# Altium PCB Laser_Arduino.PcbDoc
Units mm, origin at the board's own origin, x right, y up, seen from the top; angles counter-clockwise.
Board outline 50.7 x 53.23 mm, 2 copper layers (Top Layer, Bottom Layer), stack 1.671 mm thick; 23 components, 18 nets, 92 pads, 2 vias.
Unrouted connection lines stored in the file: 6.
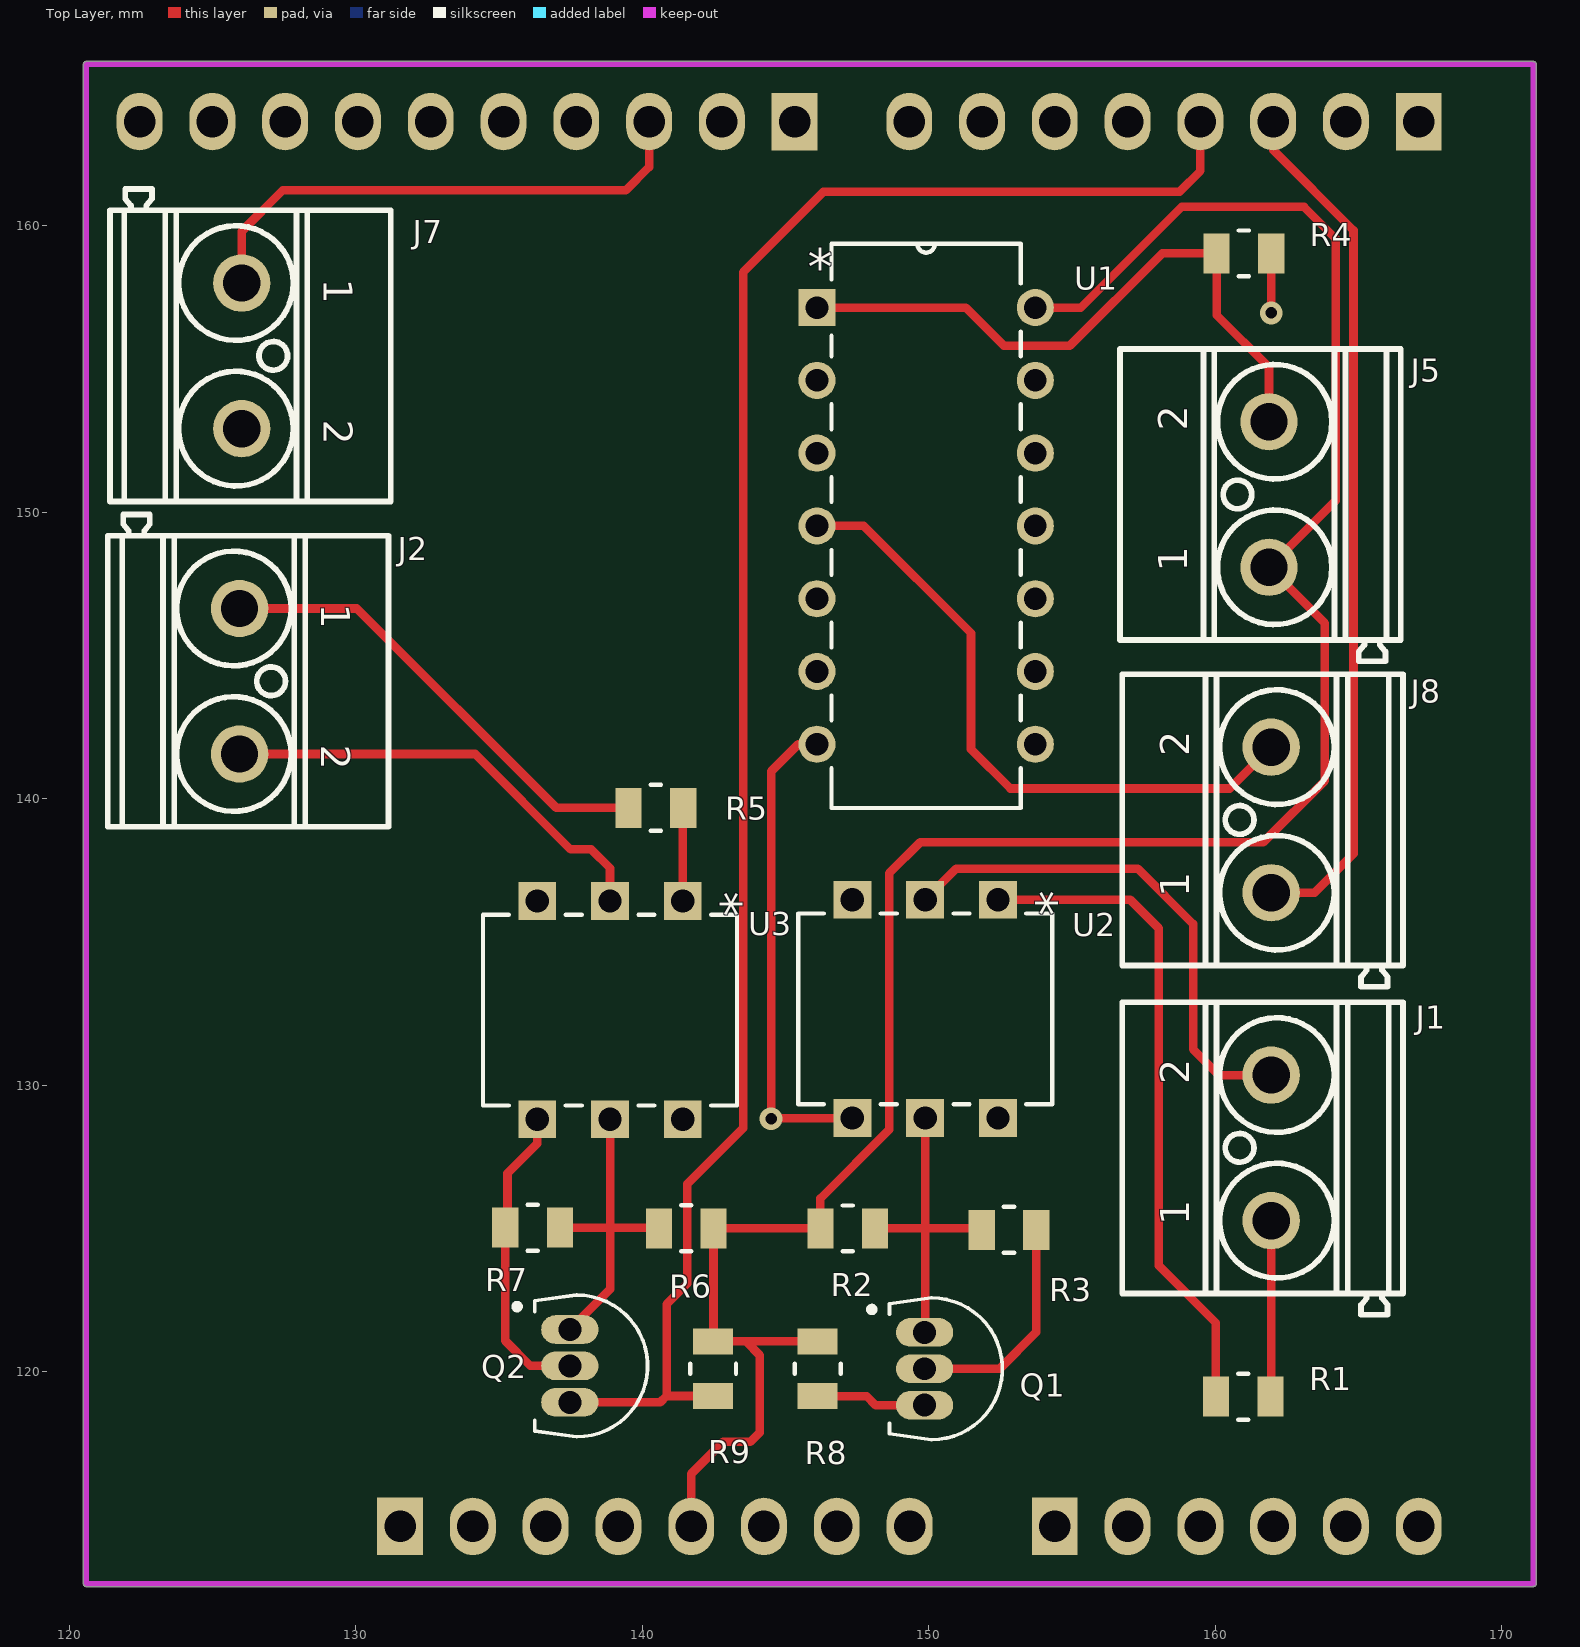
[diagram p0: Top Layer view]
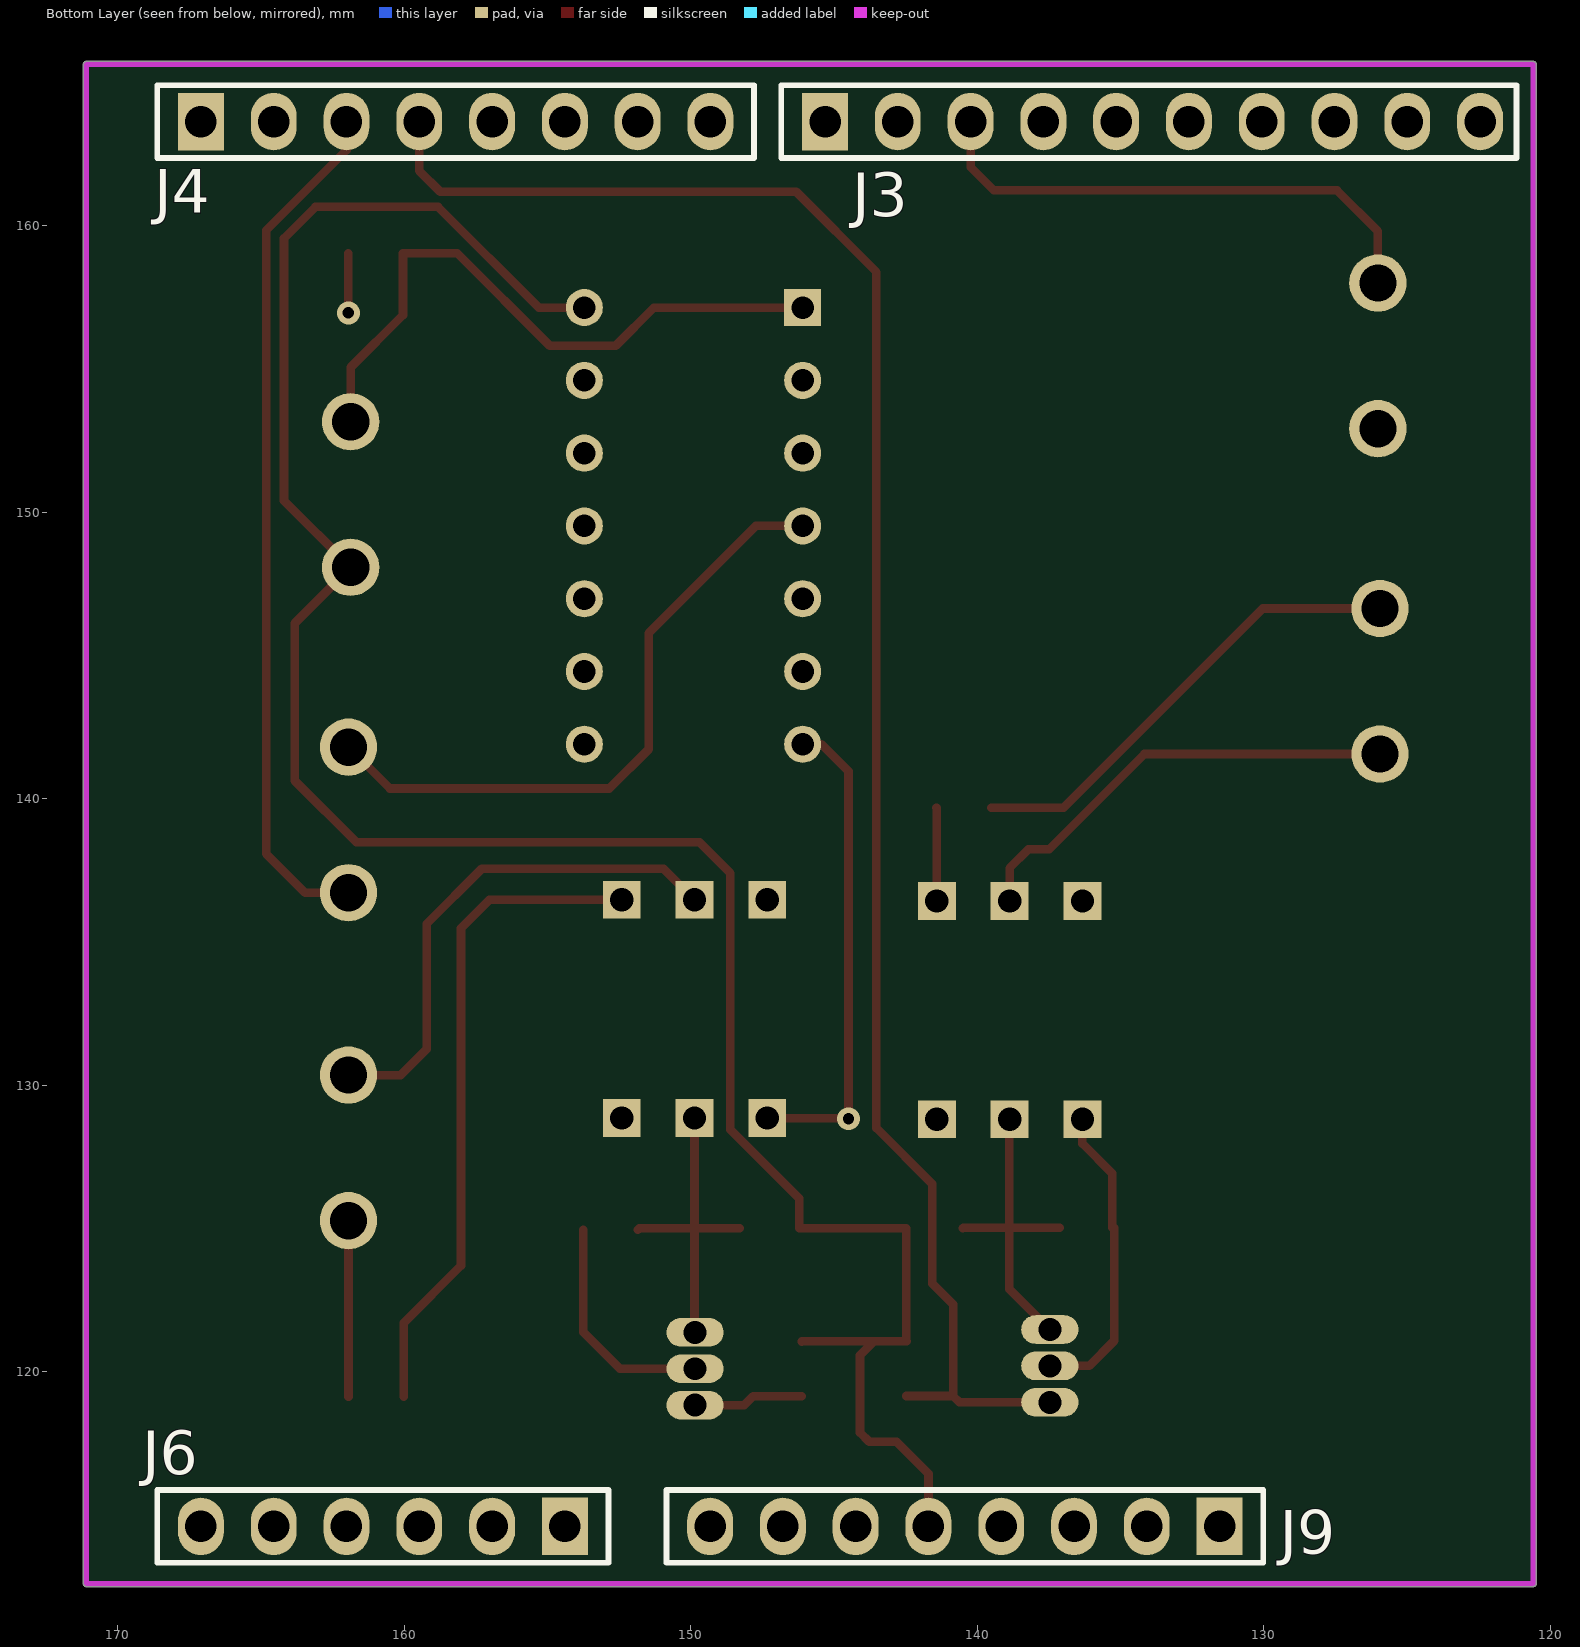
[diagram p1: Bottom Layer view, seen from below]
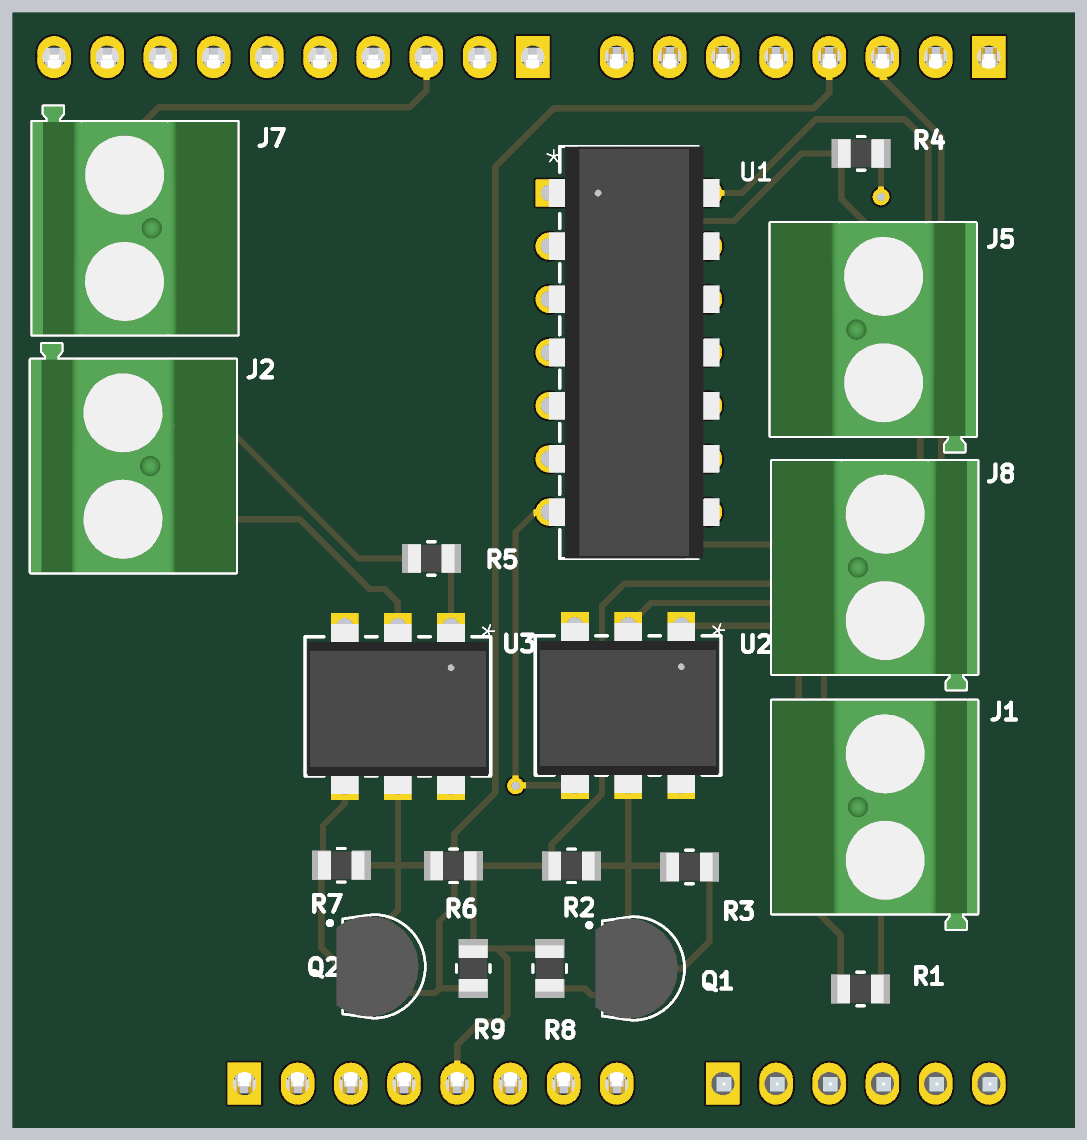
[diagram p2: 3D render of the assembled board from above, using the file's embedded part models]
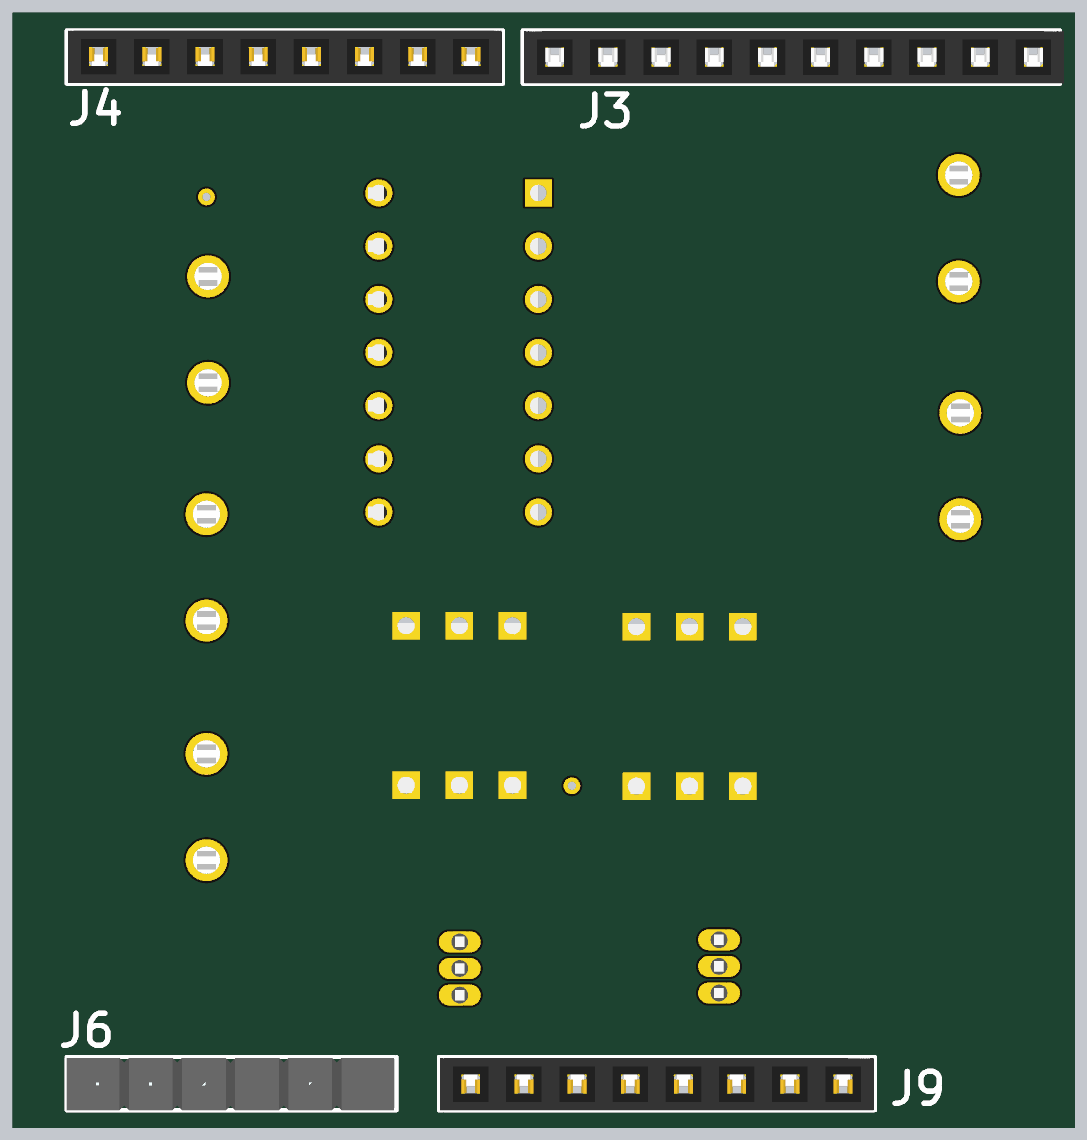
[diagram p3: 3D render of the assembled board from below, using the file's embedded part models]

## Layer stack, top to bottom
Top Solder: solder mask 0.0102, Solder Resist, Dk 3.5
Top Layer: signal copper 0.0356
Dielectric 1: dielectric 1.6, FR-4, Dk 4.8
Bottom Layer: signal copper 0.0356
Bottom Solder: solder mask 0.0102, Solder Resist, Dk 3.5

## Board outline
120.5,112.6 ccw(c120.6,112.6) 120.6,112.5 171.1,112.5 ccw(c171.1,112.6) 171.2,112.6 171.2,165.6 ccw(c171.1,165.6) 171.2,165.612 171.2,165.613 ccw(c171.1,165.625) 171.2,165.625 ccw(c171.1,165.625) 171.1,165.725 120.6,165.725 ccw(c120.6,165.625) 120.5,165.625

## Design rules (kind name [scope] priority, off if disabled: settings)
Clearance Clearance_poly [All vs InPolygon] p1: gap=0.4 ignorepadtopadclearanceinfootprint=FALSE
Clearance [All] p2: gap=0.1 ignorepadtopadclearanceinfootprint=FALSE
HoleSize [All] p1: absolutevalues=TRUE maxlimit=4 minlimit=0.025 maxpercent=80.000 minpercent=20.000
MinimumSolderMaskSliver [All] p1: minsoldermaskwidth=0.1
PolygonConnect PolygonConnect_via [InNet('GND') vs IsVia] p1: connectstyle=Direct reliefconductorwidth=0.254 reliefentries=4 polygonreliefangle="90 Angle" airgapwidth=0.254
PolygonConnect [All] p2: connectstyle=Relief reliefconductorwidth=0.254 reliefentries=4 polygonreliefangle="90 Angle" airgapwidth=0.254
RoutingVias [All] p1: holewidth=0.4 width=0.8 viastyle="Through Hole" minholewidth=0.4 minwidth=0.8 maxholewidth=3.2 maxwidth=5.5
SilkToSilkClearance [All] p1: silktosilkclearance=0.1
SilkToSolderMaskClearance [IsPad] p1: minsilkscreentomaskgap=0.1 clearancetoexposedcopper=TRUE
SolderMaskExpansion [All] p1: expansion=0.102
Width [All] p1: maxlimit=2 minlimit=0.2 preferedwidth=0.3
26 further rules are at their usual default settings.

## Components (designator, comment, footprint, x,y, rotation, side; value= is the part's Value field where it differs from the comment)
J1 "Family" PHOENIX_1715721 161.95,127.81 r90 top
J2 "Family" PHOENIX_1715721 125.95,144.095 r270 top
J3 "HDR Female" Female_Header_10 145.32,163.625 r90 bottom locked
J4 "" "HDR Female 1�~8 2.54mm" 167.1,163.625 r90 bottom locked
J5 "Family" PHOENIX_1715721 161.875,150.611 r90 top
J6 "HDR Female 1×6" "HDR Female 1�~6 2.54mm" 154.4,114.6 r270 bottom locked
J7 "Family" PHOENIX_1715721 126.025,155.45 r270 top
J8 "Family" PHOENIX_1715721 161.95,139.255 r90 top
J9 "" "HDR Female 1�~8 2.54mm" 131.55,114.6 r270 bottom locked
Q1 "n-p-n" TO92127P495H695-3 150.6,120.1 r270 top
Q2 "n-p-n" TO92127P495H695-3 138.218,120.2 r270 top
R1 "Res1" STA_RMCF0805_STP-M 160.975,119.125 r0 top
R2 "Res1" STA_RMCF0805_STP-M 147.172,125 r180 top
R3 "Res1" STA_RMCF0805_STP-M 152.803,124.95 r180 top
R4 "Res1" STA_RMCF0805_STP-M 161,159.025 r180 top
R5 "Res1" STA_RMCF0805_STP-M 140.477,139.677 r180 top
R6 "Res1" STA_RMCF0805_STP-M 141.538,125.002 r0 top
R7 "Res1" STA_RMCF0805_STP-M 136.175,125.025 r0 top
R8 "Res1" STA_RMCF0805_STP-M 146.125,120.1 r90 top
R9 "Res1" STA_RMCF0805_STP-M 142.475,120.102 r90 top
U1 "SN74HC14N" N14 153.72,141.895 r0 top
U2 "4N33" DIP-6_4N33_VIS 152.415,136.47 r270 top
U3 "4N33" DIP-6_4N33_VIS 141.417,136.427 r270 top

## Footprints (in the part's own frame and the unit in brackets; to place one, negate y for a bottom-side part, rotate by r counter-clockwise, add the part's x,y. Pads: shape width x height; smd on the part's side, far side on the other; paste and mask are expansions set on the pad)
DIP-6_4N33_VIS [mil]
  rect 52x52 hole 32 mask+0: 1(0,0) 2(0,-100) 3(0,-200) 4(300,-200) 5(300,-100) 6(300,0)
  silkscreen extent 19,-274 281,75, body extent -5,-269 315,69, height 155
Female_Header_10 [mm]
  rect 2x1.6 hole 1.1: 1(0,0)
  oval 2x1.6 hole 1.1: 2(0,-2.54) 3(0,-5.08) 4(0,-7.62) 5(0,-10.16) 6(0,-12.7) 7(0,-15.24) 8(0,-17.78) 9(0,-20.32) 10(0,-22.86)
  silkscreen extent -1.27,-24.13 1.27,1.52, body extent -1.25,-24.33 1.25,1.47, height 8.31
"HDR Female 1�~6 2.54mm" [mm]
  rect 2x1.6 hole 1.1: 1(0,0)
  oval 2x1.6 hole 1.1: 2(0,-2.54) 3(0,-5.08) 4(0,-7.62) 5(0,-10.16) 6(0,-12.7)
  silkscreen extent -1.27,-14.22 1.27,1.52, body extent -1.23,-14.22 1.27,1.42, height 8.66
"HDR Female 1�~8 2.54mm" [mm]
  rect 2x1.6 hole 1.1: 1(0,0)
  oval 2x1.6 hole 1.1: 2(0,-2.54) 3(0,-5.08) 4(0,-7.62) 5(0,-10.16) 6(0,-12.7) 7(0,-15.24) 8(0,-17.78)
  silkscreen extent -1.27,-19.3 1.27,1.52, body extent -1.23,-19.25 1.27,1.47, height 8.31
N14 [mil]
  rect 51x51 hole 31: 1(-300,600)
  round 51 hole 31: 2(-300,500) 3(-300,400) 4(-300,300) 5(-300,200) 6(-300,100) 7(-300,0) 8(0,0) 9(0,100) 10(0,200) 11(0,300) 12(0,400) 13(0,500) 14(0,600)
  silkscreen extent -280,-88 -20,688, body extent -300,-87 20,687, height 205
PHOENIX_1715721 [mm] "Terminal Block, 17.5A 400V, Pitch 5.08mm, 2 Positions, Screw Connection"
  round 2 hole 1.3: 1(-2.54,0) 2(2.54,0)
  silkscreen extent -5.82,-4.6 5.08,5.2, body extent -5.82,-4.6 5.08,5.2, height 14.2
STA_RMCF0805_STP-M [mil]
  rect 36x55 smd paste+0 mask+0: 1(-37.5,0) 2(37.5,0)
  silkscreen extent -7,-32 7,32, body extent -44,-26 44,26, height 26
TO92127P495H695-3 [mm]
  oval 1x2 hole 0.8: 1(-1.27,-0.745) 2(0,-0.745) 3(1.27,-0.745)
  silkscreen extent -2.47,-2.68 2.47,1.97, body extent -2.4,-2.27 2.4,1.66, height 9

## Part data
J1 J2 J5 J7 J8: "Connection -POENIX", Manufacturer="PHOENIX CONTACT", Manufacturer Part Number="1715721 (MKDS 1,5/2-5,08)", Part Number=PHOENIX_1715721, Author="CERN DEM JLC", ComponentHeight=13.8mm, Component Type=Standard, CreateDate=06.01.2010, HelpURL=\\cern.ch\dfs\Applications\Altium\Datasheets\PHOENIX_1715721.pdf, LatestRevisionDate=25.02.2013, Mounted=Yes, Part Description="17.5A, 400V, Terminal Block, Pitch 5.08mm, 2 Positions, Screw Connection", Pin Count=2, PressFit=No, Sense=No, SMD=No, Socket=No, Status=None
J3: library part M20-7821046, "HARWIN - M20-7821046 - Board-To-Board Connector, M20 Series, Through Hole, Receptacle, 10, 2.54 mm, Tin Plated Contacts", Case/Package=SIL, Color=Black, Contact Resistance=20mR, Current Rating=3A, Insulation Resistance=1MR, Manufacturer=Harwin, Max Operating Temperature=105°C, Min Operating Temperature=-40°C, Package Quantity=23, Supplier Part Number 1=952-1847-ND, Category="Headers and Wire Housings", ComponentLink1Description=https://datasheet.ciiva.com/26899/getdatasheetpartid-559226-26899379.pdf?src-supplier=Verical, ComponentLink1URL=https://datasheet.ciiva.com/26899/getdatasheetpartid-559226-26899379.pdf?src-supplier=Verical, ComponentLink2Description=https://datasheet.ciiva.com/11753/0900766b80dc1d2b-11753869.pdf?src-supplier=RSComponents, ComponentLink2URL=https://datasheet.ciiva.com/11753/0900766b80dc1d2b-11753869.pdf?src-supplier=RSComponents, ComponentLink3Description=https://datasheet.ciiva.com/6785/m20-782-6785605.pdf?src-supplier=Digi-Key, ComponentLink3URL=https://datasheet.ciiva.com/6785/m20-782-6785605.pdf?src-supplier=Digi-Key, ComponentLink4Description=https://datasheet.ciiva.com/10151/m20-782-10151366.pdf?src-supplier=Avnet, ComponentLink4URL=https://datasheet.ciiva.com/10151/m20-782-10151366.pdf?src-supplier=Avnet, ComponentLink5Description=https://datasheet.ciiva.com/16732/m20-782-16732152.pdf?src-supplier=Avnet+Europe, ComponentLink5URL=https://datasheet.ciiva.com/16732/m20-782-16732152.pdf?src-supplier=Avnet+Europe, Connector Type=Receptacle,Socket, Contact Gender=Female, Contact Material=Bronze, Contact Plating=Tin, Depth=2.5mm, Gender=Receptacle, Hole Diameter=0.8mm, Housing Color=Black, Housing Material=Polyamide, Lead Pitch=2.54mm, Length=25.8mm, Manufacturer Part Number=M20-7821046, Mating Cycles=50, Max Current Rating=3A, Mount="Through Hole", Number of Contacts=10, Number of Positions=10, Number of Rows=1, Orientation=Straight, Packaging=Rail/Tube, Pitch=2.54mm, Pricing 1="1=1,28000, 10=1,12200, 100=0,96800, 500=0,79200, 1000=0,70400, 5000=0,61600, 10000=0,58520 (USD)", Radiation Hardening=No, REACH SVHC="No SVHC", RoHS=Yes, Stock 1=97, Supplier 1=Digi-Key, Termination=Solder
J4: library part M20-7820646, "06-WAY SIL VERT SOCKET L/FREE", Case/Package=SIL, Color=Black, Contact Resistance=20mR, Manufacturer=Harwin, Max Current Rating=3A, Max Operating Temperature=105°C, Min Operating Temperature=-40°C, Package Quantity=38, Supplier Part Number 1=952-1809-ND, Category="Headers and Wire Housings", ComponentLink1Description=http://components.arrow.com/part/dataview/0323_00725884?src-supplier=Arrow+Europe, ComponentLink1URL=http://components.arrow.com/part/dataview/0323_00725884?src-supplier=Arrow+Europe, ComponentLink2Description=http://www.harwin.com/include/downloads/pdfs/2010PAGE120.PDF?src-supplier=Avnet, ComponentLink2URL=http://www.harwin.com/include/downloads/pdfs/2010PAGE120.PDF?src-supplier=Avnet, ComponentLink3Description=https://cdn.harwin.com/pdfs/M20-782.pdf?src-supplier=Digi-Key, ComponentLink3URL=https://cdn.harwin.com/pdfs/M20-782.pdf?src-supplier=Digi-Key, ComponentLink4Description=https://cdn.harwin.com/pdfs/Harwin_PC_Connectors_M20.pdf?src-supplier=Avnet+Europe, ComponentLink4URL=https://cdn.harwin.com/pdfs/Harwin_PC_Connectors_M20.pdf?src-supplier=Avnet+Europe, ComponentLink5Description=https://cdn.harwin.com/pdfs/Harwin_PC_Connectors_M20.pdf?src-supplier=RSComponents, ComponentLink5URL=https://cdn.harwin.com/pdfs/Harwin_PC_Connectors_M20.pdf?src-supplier=RSComponents, ComponentLink6Description=https://cdn.harwin.com/pdfs/Harwin_PC_Connectors_M20.pdf?src-supplier=Mouser, ComponentLink6URL=https://cdn.harwin.com/pdfs/Harwin_PC_Connectors_M20.pdf?src-supplier=Mouser, ComponentLink7Description=https://cdn.harwin.com/pdfs/Harwin_PC_Connectors_M20.pdf?src-supplier=TTI, ComponentLink7URL=https://cdn.harwin.com/pdfs/Harwin_PC_Connectors_M20.pdf?src-supplier=TTI, Connector Type=Receptacle,Socket, Contact Gender=Female, Contact Material=Bronze, Contact Plating=Tin, Depth=2.5mm, Gender=Female, Housing Color=Black, Housing Material=Nylon, Length=15.64mm, Manufacturer Part Number=M20-7820646, Mount="Through Hole", Number of Contacts=6, Number of Positions=6, Number of Rows=1, Orientation=Straight, Packaging=Rail/Tube, Pitch=2.54mm, Pricing 1="1=0,96000, 10=0,84200, 100=0,72600, 500=0,59400, 1000=0,52800, 5000=0,46200, 10000=0,43890 (USD)", Radiation Hardening=No, RoHS=Yes, Stock 1=1563, Supplier 1=Digi-Key, Termination=Solder
J6 J9: library part M20-7820842, "2.54mm (0.1\") Pitch SIL Vertical PC Tail Socket Assembly, selective gold + tin, 8 contacts", Case/Package=SIL, Color=Black, Contact Resistance=20mR, Manufacturer=Harwin, Max Current Rating=3A, Max Operating Temperature=105°C, Min Operating Temperature=-40°C, Package Quantity=29, Supplier Part Number 1=952-1823-ND, Category="Headers and Wire Housings", ComponentLink1Description=https://datasheet.ciiva.com/16732/m20-782-16732663.pdf?src-supplier=Avnet+Europe, ComponentLink1URL=https://datasheet.ciiva.com/16732/m20-782-16732663.pdf?src-supplier=Avnet+Europe, ComponentLink2Description=https://datasheet.ciiva.com/9480/m20-782-9480074.pdf?src-supplier=Avnet, ComponentLink2URL=https://datasheet.ciiva.com/9480/m20-782-9480074.pdf?src-supplier=Avnet, Connector Type=Receptacle,Socket, Contact Gender=Female, Contact Material=Bronze, Contact Plating=Tin,Gold, Depth=2.5mm, Gender=Female, Housing Color=Black, Housing Material=Polyamide, Length=20.72mm, Manufacturer Part Number=M20-7820842, Mount="Through Hole", Number of Contacts=8, Number of Positions=8, Number of Rows=1, Orientation=Straight, Packaging=Rail/Tube, Pitch=2.54mm, Pricing 1="1=1,10000, 10=0,97200, 100=0,83820, 500=0,68580, 1000=0,60960, 5000=0,53340, 10000=0,50673 (USD)", Radiation Hardening=No, RoHS=Yes, Stock 1=1803, Supplier 1=Digi-Key, Termination=Solder, Weight=0.025397oz
Q1 Q2: library part KT417, "Bipolar transistor"
R1: "Chip Resistor", Case/Package=0603, Case Code (Metric)=1608, Manufacturer=Panasonic, Manufacturer Part Number=ERJ-3GEYJ103V, Max Operating Temperature=155°C, Max Power Dissipation=100mW, Min Operating Temperature=-55°C, Package Quantity=1, Resistance=130, Supplier Part Number 1=P10KGDKR-ND, Temperature Coefficient=200ppm/°C, Tolerance=5%, Voltage Rating=75V, Voltage Rating (DC)=50V, Case Code (Imperial)=0603, ComponentLink1Description=https://datasheet.ciiva.com/34303/2007265-34303757.pdf, ComponentLink1URL=https://datasheet.ciiva.com/34303/2007265-34303757.pdf, ComponentLink2Description=https://datasheet.ciiva.com/11809/0900766b80f806dd-11809566.pdf, ComponentLink2URL=https://datasheet.ciiva.com/11809/0900766b80f806dd-11809566.pdf, ComponentLink3Description=https://datasheet.ciiva.com/28514/1678796-28514213.pdf, ComponentLink3URL=https://datasheet.ciiva.com/28514/1678796-28514213.pdf, ComponentLink4Description=https://datasheet.ciiva.com/30147/4aoa0000ce1-30147029.pdf, ComponentLink4URL=https://datasheet.ciiva.com/30147/4aoa0000ce1-30147029.pdf, ComponentLink5Description=https://datasheet.ciiva.com/46371/1678796-46371909.pdf, ComponentLink5URL=https://datasheet.ciiva.com/46371/1678796-46371909.pdf, ComponentLink6Description=https://datasheet.ciiva.com/24133/aoa0000ce1-37422-24133064.pdf, ComponentLink6URL=https://datasheet.ciiva.com/24133/aoa0000ce1-37422-24133064.pdf, ComponentLink7Description=https://datasheet.ciiva.com/46385/1678796-46385240.pdf, ComponentLink7URL=https://datasheet.ciiva.com/46385/1678796-46385240.pdf, ComponentLink8Description=https://datasheet.ciiva.com/17212/aoa0000ce1-17212106.pdf, ComponentLink8URL=https://datasheet.ciiva.com/17212/aoa0000ce1-17212106.pdf, ComponentLink9Description=https://datasheet.ciiva.com/9117/aoa0000ce1-9117038.pdf, ComponentLink9URL=https://datasheet.ciiva.com/9117/aoa0000ce1-9117038.pdf, ComponentLink10Description=https://datasheet.ciiva.com/16740/aoa0000ce1-16740655.pdf, ComponentLink10URL=https://datasheet.ciiva.com/16740/aoa0000ce1-16740655.pdf, ComponentLink11Description=https://datasheet.ciiva.com/48531/aoa0000ce1-48531887.pdf, ComponentLink11URL=https://datasheet.ciiva.com/48531/aoa0000ce1-48531887.pdf, Composition="Thick Film", Contact Plating=Tin, Depth=0.8mm, Features="Automotive AEC-Q200", Height=0.45mm, Lead Free="Lead Free", Length=1.6mm, Military Standard=Not, Mount="Surface Mount", Number of Terminations=2, Packaging="Tape and Reel", Power Rating=100mW, Pricing 1="1=0.1, 10=0.054, 100=0.022, 1000=0.00988, 2500=0.00858 (USD)", REACH SVHC="No SVHC", Stock 1=10740434, Supplier 1=Digi-Key, Termination=SMD/SMT, Weight=7.1E-05oz, Width=0.8mm, Working Voltage=75V
R2 R5 R6: "Chip Resistor", Case/Package=0603, Case Code (Metric)=1608, Manufacturer=Panasonic, Manufacturer Part Number=ERJ-3GEYJ103V, Max Operating Temperature=155°C, Max Power Dissipation=100mW, Min Operating Temperature=-55°C, Package Quantity=1, Resistance=2k, Supplier Part Number 1=P10KGDKR-ND, Temperature Coefficient=200ppm/°C, Tolerance=5%, Voltage Rating=75V, Voltage Rating (DC)=50V, Case Code (Imperial)=0603, ComponentLink1Description=https://datasheet.ciiva.com/34303/2007265-34303757.pdf, ComponentLink1URL=https://datasheet.ciiva.com/34303/2007265-34303757.pdf, ComponentLink2Description=https://datasheet.ciiva.com/11809/0900766b80f806dd-11809566.pdf, ComponentLink2URL=https://datasheet.ciiva.com/11809/0900766b80f806dd-11809566.pdf, ComponentLink3Description=https://datasheet.ciiva.com/28514/1678796-28514213.pdf, ComponentLink3URL=https://datasheet.ciiva.com/28514/1678796-28514213.pdf, ComponentLink4Description=https://datasheet.ciiva.com/30147/4aoa0000ce1-30147029.pdf, ComponentLink4URL=https://datasheet.ciiva.com/30147/4aoa0000ce1-30147029.pdf, ComponentLink5Description=https://datasheet.ciiva.com/46371/1678796-46371909.pdf, ComponentLink5URL=https://datasheet.ciiva.com/46371/1678796-46371909.pdf, ComponentLink6Description=https://datasheet.ciiva.com/24133/aoa0000ce1-37422-24133064.pdf, ComponentLink6URL=https://datasheet.ciiva.com/24133/aoa0000ce1-37422-24133064.pdf, ComponentLink7Description=https://datasheet.ciiva.com/46385/1678796-46385240.pdf, ComponentLink7URL=https://datasheet.ciiva.com/46385/1678796-46385240.pdf, ComponentLink8Description=https://datasheet.ciiva.com/17212/aoa0000ce1-17212106.pdf, ComponentLink8URL=https://datasheet.ciiva.com/17212/aoa0000ce1-17212106.pdf, ComponentLink9Description=https://datasheet.ciiva.com/9117/aoa0000ce1-9117038.pdf, ComponentLink9URL=https://datasheet.ciiva.com/9117/aoa0000ce1-9117038.pdf, ComponentLink10Description=https://datasheet.ciiva.com/16740/aoa0000ce1-16740655.pdf, ComponentLink10URL=https://datasheet.ciiva.com/16740/aoa0000ce1-16740655.pdf, ComponentLink11Description=https://datasheet.ciiva.com/48531/aoa0000ce1-48531887.pdf, ComponentLink11URL=https://datasheet.ciiva.com/48531/aoa0000ce1-48531887.pdf, Composition="Thick Film", Contact Plating=Tin, Depth=0.8mm, Features="Automotive AEC-Q200", Height=0.45mm, Lead Free="Lead Free", Length=1.6mm, Military Standard=Not, Mount="Surface Mount", Number of Terminations=2, Packaging="Tape and Reel", Power Rating=100mW, Pricing 1="1=0.1, 10=0.054, 100=0.022, 1000=0.00988, 2500=0.00858 (USD)", REACH SVHC="No SVHC", Stock 1=10740434, Supplier 1=Digi-Key, Termination=SMD/SMT, Weight=7.1E-05oz, Width=0.8mm, Working Voltage=75V
R3: "Chip Resistor", Case/Package=0603, Case Code (Metric)=1608, Manufacturer=Panasonic, Manufacturer Part Number=ERJ-3GEYJ103V, Max Operating Temperature=155°C, Max Power Dissipation=100mW, Min Operating Temperature=-55°C, Package Quantity=1, Resistance=370, Supplier Part Number 1=P10KGDKR-ND, Temperature Coefficient=200ppm/°C, Tolerance=5%, Voltage Rating=75V, Voltage Rating (DC)=50V, Case Code (Imperial)=0603, ComponentLink1Description=https://datasheet.ciiva.com/34303/2007265-34303757.pdf, ComponentLink1URL=https://datasheet.ciiva.com/34303/2007265-34303757.pdf, ComponentLink2Description=https://datasheet.ciiva.com/11809/0900766b80f806dd-11809566.pdf, ComponentLink2URL=https://datasheet.ciiva.com/11809/0900766b80f806dd-11809566.pdf, ComponentLink3Description=https://datasheet.ciiva.com/28514/1678796-28514213.pdf, ComponentLink3URL=https://datasheet.ciiva.com/28514/1678796-28514213.pdf, ComponentLink4Description=https://datasheet.ciiva.com/30147/4aoa0000ce1-30147029.pdf, ComponentLink4URL=https://datasheet.ciiva.com/30147/4aoa0000ce1-30147029.pdf, ComponentLink5Description=https://datasheet.ciiva.com/46371/1678796-46371909.pdf, ComponentLink5URL=https://datasheet.ciiva.com/46371/1678796-46371909.pdf, ComponentLink6Description=https://datasheet.ciiva.com/24133/aoa0000ce1-37422-24133064.pdf, ComponentLink6URL=https://datasheet.ciiva.com/24133/aoa0000ce1-37422-24133064.pdf, ComponentLink7Description=https://datasheet.ciiva.com/46385/1678796-46385240.pdf, ComponentLink7URL=https://datasheet.ciiva.com/46385/1678796-46385240.pdf, ComponentLink8Description=https://datasheet.ciiva.com/17212/aoa0000ce1-17212106.pdf, ComponentLink8URL=https://datasheet.ciiva.com/17212/aoa0000ce1-17212106.pdf, ComponentLink9Description=https://datasheet.ciiva.com/9117/aoa0000ce1-9117038.pdf, ComponentLink9URL=https://datasheet.ciiva.com/9117/aoa0000ce1-9117038.pdf, ComponentLink10Description=https://datasheet.ciiva.com/16740/aoa0000ce1-16740655.pdf, ComponentLink10URL=https://datasheet.ciiva.com/16740/aoa0000ce1-16740655.pdf, ComponentLink11Description=https://datasheet.ciiva.com/48531/aoa0000ce1-48531887.pdf, ComponentLink11URL=https://datasheet.ciiva.com/48531/aoa0000ce1-48531887.pdf, Composition="Thick Film", Contact Plating=Tin, Depth=0.8mm, Features="Automotive AEC-Q200", Height=0.45mm, Lead Free="Lead Free", Length=1.6mm, Military Standard=Not, Mount="Surface Mount", Number of Terminations=2, Packaging="Tape and Reel", Power Rating=100mW, Pricing 1="1=0.1, 10=0.054, 100=0.022, 1000=0.00988, 2500=0.00858 (USD)", REACH SVHC="No SVHC", Stock 1=10740434, Supplier 1=Digi-Key, Termination=SMD/SMT, Weight=7.1E-05oz, Width=0.8mm, Working Voltage=75V
R4: "Chip Resistor", Case/Package=0603, Case Code (Metric)=1608, Manufacturer=Panasonic, Manufacturer Part Number=ERJ-3GEYJ103V, Max Operating Temperature=155°C, Max Power Dissipation=100mW, Min Operating Temperature=-55°C, Package Quantity=1, Resistance=10k, Supplier Part Number 1=P10KGDKR-ND, Temperature Coefficient=200ppm/°C, Tolerance=5%, Voltage Rating=75V, Voltage Rating (DC)=50V, Case Code (Imperial)=0603, ComponentLink1Description=https://datasheet.ciiva.com/34303/2007265-34303757.pdf, ComponentLink1URL=https://datasheet.ciiva.com/34303/2007265-34303757.pdf, ComponentLink2Description=https://datasheet.ciiva.com/11809/0900766b80f806dd-11809566.pdf, ComponentLink2URL=https://datasheet.ciiva.com/11809/0900766b80f806dd-11809566.pdf, ComponentLink3Description=https://datasheet.ciiva.com/28514/1678796-28514213.pdf, ComponentLink3URL=https://datasheet.ciiva.com/28514/1678796-28514213.pdf, ComponentLink4Description=https://datasheet.ciiva.com/30147/4aoa0000ce1-30147029.pdf, ComponentLink4URL=https://datasheet.ciiva.com/30147/4aoa0000ce1-30147029.pdf, ComponentLink5Description=https://datasheet.ciiva.com/46371/1678796-46371909.pdf, ComponentLink5URL=https://datasheet.ciiva.com/46371/1678796-46371909.pdf, ComponentLink6Description=https://datasheet.ciiva.com/24133/aoa0000ce1-37422-24133064.pdf, ComponentLink6URL=https://datasheet.ciiva.com/24133/aoa0000ce1-37422-24133064.pdf, ComponentLink7Description=https://datasheet.ciiva.com/46385/1678796-46385240.pdf, ComponentLink7URL=https://datasheet.ciiva.com/46385/1678796-46385240.pdf, ComponentLink8Description=https://datasheet.ciiva.com/17212/aoa0000ce1-17212106.pdf, ComponentLink8URL=https://datasheet.ciiva.com/17212/aoa0000ce1-17212106.pdf, ComponentLink9Description=https://datasheet.ciiva.com/9117/aoa0000ce1-9117038.pdf, ComponentLink9URL=https://datasheet.ciiva.com/9117/aoa0000ce1-9117038.pdf, ComponentLink10Description=https://datasheet.ciiva.com/16740/aoa0000ce1-16740655.pdf, ComponentLink10URL=https://datasheet.ciiva.com/16740/aoa0000ce1-16740655.pdf, ComponentLink11Description=https://datasheet.ciiva.com/48531/aoa0000ce1-48531887.pdf, ComponentLink11URL=https://datasheet.ciiva.com/48531/aoa0000ce1-48531887.pdf, Composition="Thick Film", Contact Plating=Tin, Depth=0.8mm, Features="Automotive AEC-Q200", Height=0.45mm, Lead Free="Lead Free", Length=1.6mm, Military Standard=Not, Mount="Surface Mount", Number of Terminations=2, Packaging="Tape and Reel", Power Rating=100mW, Pricing 1="1=0.1, 10=0.054, 100=0.022, 1000=0.00988, 2500=0.00858 (USD)", REACH SVHC="No SVHC", Stock 1=10740434, Supplier 1=Digi-Key, Termination=SMD/SMT, Weight=7.1E-05oz, Width=0.8mm, Working Voltage=75V
R7: "Chip Resistor", Case/Package=0603, Case Code (Metric)=1608, Manufacturer=Panasonic, Manufacturer Part Number=ERJ-3GEYJ103V, Max Operating Temperature=155°C, Max Power Dissipation=100mW, Min Operating Temperature=-55°C, Package Quantity=1, Resistance=390, Supplier Part Number 1=P10KGDKR-ND, Temperature Coefficient=200ppm/°C, Tolerance=5%, Voltage Rating=75V, Voltage Rating (DC)=50V, Case Code (Imperial)=0603, ComponentLink1Description=https://datasheet.ciiva.com/34303/2007265-34303757.pdf, ComponentLink1URL=https://datasheet.ciiva.com/34303/2007265-34303757.pdf, ComponentLink2Description=https://datasheet.ciiva.com/11809/0900766b80f806dd-11809566.pdf, ComponentLink2URL=https://datasheet.ciiva.com/11809/0900766b80f806dd-11809566.pdf, ComponentLink3Description=https://datasheet.ciiva.com/28514/1678796-28514213.pdf, ComponentLink3URL=https://datasheet.ciiva.com/28514/1678796-28514213.pdf, ComponentLink4Description=https://datasheet.ciiva.com/30147/4aoa0000ce1-30147029.pdf, ComponentLink4URL=https://datasheet.ciiva.com/30147/4aoa0000ce1-30147029.pdf, ComponentLink5Description=https://datasheet.ciiva.com/46371/1678796-46371909.pdf, ComponentLink5URL=https://datasheet.ciiva.com/46371/1678796-46371909.pdf, ComponentLink6Description=https://datasheet.ciiva.com/24133/aoa0000ce1-37422-24133064.pdf, ComponentLink6URL=https://datasheet.ciiva.com/24133/aoa0000ce1-37422-24133064.pdf, ComponentLink7Description=https://datasheet.ciiva.com/46385/1678796-46385240.pdf, ComponentLink7URL=https://datasheet.ciiva.com/46385/1678796-46385240.pdf, ComponentLink8Description=https://datasheet.ciiva.com/17212/aoa0000ce1-17212106.pdf, ComponentLink8URL=https://datasheet.ciiva.com/17212/aoa0000ce1-17212106.pdf, ComponentLink9Description=https://datasheet.ciiva.com/9117/aoa0000ce1-9117038.pdf, ComponentLink9URL=https://datasheet.ciiva.com/9117/aoa0000ce1-9117038.pdf, ComponentLink10Description=https://datasheet.ciiva.com/16740/aoa0000ce1-16740655.pdf, ComponentLink10URL=https://datasheet.ciiva.com/16740/aoa0000ce1-16740655.pdf, ComponentLink11Description=https://datasheet.ciiva.com/48531/aoa0000ce1-48531887.pdf, ComponentLink11URL=https://datasheet.ciiva.com/48531/aoa0000ce1-48531887.pdf, Composition="Thick Film", Contact Plating=Tin, Depth=0.8mm, Features="Automotive AEC-Q200", Height=0.45mm, Lead Free="Lead Free", Length=1.6mm, Military Standard=Not, Mount="Surface Mount", Number of Terminations=2, Packaging="Tape and Reel", Power Rating=100mW, Pricing 1="1=0.1, 10=0.054, 100=0.022, 1000=0.00988, 2500=0.00858 (USD)", REACH SVHC="No SVHC", Stock 1=10740434, Supplier 1=Digi-Key, Termination=SMD/SMT, Weight=7.1E-05oz, Width=0.8mm, Working Voltage=75V
R8: "Chip Resistor", Case/Package=0603, Case Code (Metric)=1608, Manufacturer=Panasonic, Manufacturer Part Number=ERJ-3GEYJ103V, Max Operating Temperature=155°C, Max Power Dissipation=100mW, Min Operating Temperature=-55°C, Package Quantity=1, Resistance=3k, Supplier Part Number 1=P10KGDKR-ND, Temperature Coefficient=200ppm/°C, Tolerance=5%, Voltage Rating=75V, Voltage Rating (DC)=50V, Case Code (Imperial)=0603, ComponentLink1Description=https://datasheet.ciiva.com/34303/2007265-34303757.pdf, ComponentLink1URL=https://datasheet.ciiva.com/34303/2007265-34303757.pdf, ComponentLink2Description=https://datasheet.ciiva.com/11809/0900766b80f806dd-11809566.pdf, ComponentLink2URL=https://datasheet.ciiva.com/11809/0900766b80f806dd-11809566.pdf, ComponentLink3Description=https://datasheet.ciiva.com/28514/1678796-28514213.pdf, ComponentLink3URL=https://datasheet.ciiva.com/28514/1678796-28514213.pdf, ComponentLink4Description=https://datasheet.ciiva.com/30147/4aoa0000ce1-30147029.pdf, ComponentLink4URL=https://datasheet.ciiva.com/30147/4aoa0000ce1-30147029.pdf, ComponentLink5Description=https://datasheet.ciiva.com/46371/1678796-46371909.pdf, ComponentLink5URL=https://datasheet.ciiva.com/46371/1678796-46371909.pdf, ComponentLink6Description=https://datasheet.ciiva.com/24133/aoa0000ce1-37422-24133064.pdf, ComponentLink6URL=https://datasheet.ciiva.com/24133/aoa0000ce1-37422-24133064.pdf, ComponentLink7Description=https://datasheet.ciiva.com/46385/1678796-46385240.pdf, ComponentLink7URL=https://datasheet.ciiva.com/46385/1678796-46385240.pdf, ComponentLink8Description=https://datasheet.ciiva.com/17212/aoa0000ce1-17212106.pdf, ComponentLink8URL=https://datasheet.ciiva.com/17212/aoa0000ce1-17212106.pdf, ComponentLink9Description=https://datasheet.ciiva.com/9117/aoa0000ce1-9117038.pdf, ComponentLink9URL=https://datasheet.ciiva.com/9117/aoa0000ce1-9117038.pdf, ComponentLink10Description=https://datasheet.ciiva.com/16740/aoa0000ce1-16740655.pdf, ComponentLink10URL=https://datasheet.ciiva.com/16740/aoa0000ce1-16740655.pdf, ComponentLink11Description=https://datasheet.ciiva.com/48531/aoa0000ce1-48531887.pdf, ComponentLink11URL=https://datasheet.ciiva.com/48531/aoa0000ce1-48531887.pdf, Composition="Thick Film", Contact Plating=Tin, Depth=0.8mm, Features="Automotive AEC-Q200", Height=0.45mm, Lead Free="Lead Free", Length=1.6mm, Military Standard=Not, Mount="Surface Mount", Number of Terminations=2, Packaging="Tape and Reel", Power Rating=100mW, Pricing 1="1=0.1, 10=0.054, 100=0.022, 1000=0.00988, 2500=0.00858 (USD)", REACH SVHC="No SVHC", Stock 1=10740434, Supplier 1=Digi-Key, Termination=SMD/SMT, Weight=7.1E-05oz, Width=0.8mm, Working Voltage=75V
R9: "Chip Resistor", Case/Package=0603, Case Code (Metric)=1608, Manufacturer=Panasonic, Manufacturer Part Number=ERJ-3GEYJ103V, Max Operating Temperature=155°C, Max Power Dissipation=100mW, Min Operating Temperature=-55°C, Package Quantity=1, Resistance=4k, Supplier Part Number 1=P10KGDKR-ND, Temperature Coefficient=200ppm/°C, Tolerance=5%, Voltage Rating=75V, Voltage Rating (DC)=50V, Case Code (Imperial)=0603, ComponentLink1Description=https://datasheet.ciiva.com/34303/2007265-34303757.pdf, ComponentLink1URL=https://datasheet.ciiva.com/34303/2007265-34303757.pdf, ComponentLink2Description=https://datasheet.ciiva.com/11809/0900766b80f806dd-11809566.pdf, ComponentLink2URL=https://datasheet.ciiva.com/11809/0900766b80f806dd-11809566.pdf, ComponentLink3Description=https://datasheet.ciiva.com/28514/1678796-28514213.pdf, ComponentLink3URL=https://datasheet.ciiva.com/28514/1678796-28514213.pdf, ComponentLink4Description=https://datasheet.ciiva.com/30147/4aoa0000ce1-30147029.pdf, ComponentLink4URL=https://datasheet.ciiva.com/30147/4aoa0000ce1-30147029.pdf, ComponentLink5Description=https://datasheet.ciiva.com/46371/1678796-46371909.pdf, ComponentLink5URL=https://datasheet.ciiva.com/46371/1678796-46371909.pdf, ComponentLink6Description=https://datasheet.ciiva.com/24133/aoa0000ce1-37422-24133064.pdf, ComponentLink6URL=https://datasheet.ciiva.com/24133/aoa0000ce1-37422-24133064.pdf, ComponentLink7Description=https://datasheet.ciiva.com/46385/1678796-46385240.pdf, ComponentLink7URL=https://datasheet.ciiva.com/46385/1678796-46385240.pdf, ComponentLink8Description=https://datasheet.ciiva.com/17212/aoa0000ce1-17212106.pdf, ComponentLink8URL=https://datasheet.ciiva.com/17212/aoa0000ce1-17212106.pdf, ComponentLink9Description=https://datasheet.ciiva.com/9117/aoa0000ce1-9117038.pdf, ComponentLink9URL=https://datasheet.ciiva.com/9117/aoa0000ce1-9117038.pdf, ComponentLink10Description=https://datasheet.ciiva.com/16740/aoa0000ce1-16740655.pdf, ComponentLink10URL=https://datasheet.ciiva.com/16740/aoa0000ce1-16740655.pdf, ComponentLink11Description=https://datasheet.ciiva.com/48531/aoa0000ce1-48531887.pdf, ComponentLink11URL=https://datasheet.ciiva.com/48531/aoa0000ce1-48531887.pdf, Composition="Thick Film", Contact Plating=Tin, Depth=0.8mm, Features="Automotive AEC-Q200", Height=0.45mm, Lead Free="Lead Free", Length=1.6mm, Military Standard=Not, Mount="Surface Mount", Number of Terminations=2, Packaging="Tape and Reel", Power Rating=100mW, Pricing 1="1=0.1, 10=0.054, 100=0.022, 1000=0.00988, 2500=0.00858 (USD)", REACH SVHC="No SVHC", Stock 1=10740434, Supplier 1=Digi-Key, Termination=SMD/SMT, Weight=7.1E-05oz, Width=0.8mm, Working Voltage=75V
U1: "No Description Available", Mfr_Name="Texas Instruments", Copyright="Copyright (C) 2022 Ultra Librarian. All rights reserved.", Digi-Key_Part_Number_1=296-1577-5-ND, Digi-Key_Part_Number_2=927-SN74HC14N-CHP, Digi-Key_Part_Number_3=2156-SN74HC14N-ND, Manufacturer_Part_Number=SN74HC14N, RefDes=RefDes, Type=DEV
U2 U3: "No Description Available", Mfr_Name=Vishay, Copyright="Copyright (C) 2022 Ultra Librarian. All rights reserved.", Digi-Key_Part_Number_1=4N33VS-ND, Digi-Key_Part_Number_2=4N33EL-ND, Digi-Key_Part_Number_3=4N33-ND, Manufacturer_Part_Number=4N33, RefDes=RefDes, Type=DEV

## Via types
v1: diameter 0.8, hole 0.4, Top Layer to Bottom Layer, 2 vias

## Nets (pads, with @x,y where several pads share a name; then routed paths per layer and width w, separated by ;. In a path a pad name is that pad's centre, name@x,y a point inside that pad or via, vN(x,y) a via of type N, cw(c..) or ccw(c..) an arc to the next point about the centre after c; other vN are vias at no path point)
"+5 V": J5.1 J9.5 R2.2 R6.2 R8.2 R9.2 U1.14 | length 82.6
  Top Layer w0.3: J9.5 141.71,116.435 142.825,117.55 143.775,117.55 144.1,117.875 144.1,120.575 143.62,121.055 ; R8.2 146.123,121.055 143.62,121.055 ; U1.14 155.31,157.135 158.825,160.65 163.1,160.65 164.2,159.55 164.2,150.396 J5.1 163.825,146.12 163.825,140.625 161.675,138.475 149.7,138.475 148.625,137.4 148.625,128.45 146.22,126.045 R2.2 142.492,125 R6.2 142.49,121.07 R9.2 143.62,121.055
"Arduino D2": J4.3 J8.1 | length 30.2
  Top Layer w0.3: J8.1 163.465,136.715 164.825,138.075 164.825,159.825 162.02,162.63 J4.3
"Arduino D3": J4.4 Q2.3 R9.1 | length 64.6
  Top Layer w0.3: Q2.3 140.63,118.93 140.85,119.15 ; R9.1 140.85,119.15 ; J4.4 159.48,161.905 158.75,161.175 146.325,161.175 143.525,158.375 143.525,128.5 141.575,126.55 141.575,123.075 140.85,122.35 140.85,119.15
"Arduino D10": J3.3 J7.1 | length 18.5
  Top Layer w0.3: J7.1 126.025,159.8 127.45,161.225 139.425,161.225 140.24,162.04 J3.3
Avantes: J1.1 R1.2 | length 6.1
  Top Layer w0.3: R1.2@161.95,119.125 J1.1
GND: J9.6 Q1.2 Q2.2 R3.1 R4.1 R7.1 U1.7 U2.4 U3.4 | length 37.8
  Top Layer w0.3: R7.1 135.223,121.077 136.1,120.2 Q2.2 ; R7.1@135.3,125.025 135.3,126.925 136.337,127.962 U3.4 U3.4@136.337,128.857 ; v1(144.5,128.825) 144.5,140.95 145.445,141.895 U1.7 ; v1@144.525,128.85 U2.4 ; Q1.2 152.475,120.1 153.755,121.38 R3.1 ; v1(161.952,156.948) R4.1
"GND D": J3.7 J7.2
K1: J8.2 U1.4 | length 22.6
  Top Layer w0.3: U1.4 147.735,149.515 151.475,145.775 151.475,141.725 152.85,140.35 160.505,140.35 J8.2
Lamp_OUT: J2.1 R5.2 | length 16.5
  Top Layer w0.3: J2.1 130.04,146.635 136.998,139.677 R5.2
NetJ1_2: J1.2 U2.2 | length 18.1
  Top Layer w0.3: U2.2 150.955,137.55 157.3,137.55 159.225,135.625 159.225,131.25 160.125,130.35 J1.2
NetJ2_2: J2.2 U3.2 | length 15.7
  Top Layer w0.3: J2.2 134.17,141.555 137.5,138.225 138.225,138.225 138.877,137.572 U3.2
NetJ5_2: J5.2 R4.2 U1.1 | length 22.5
  Top Layer w0.3: U1.1 151.29,157.135 152.625,155.8 154.925,155.8 158.15,159.025 R4.2 160.047,156.878 161.875,155.05 J5.2
NetQ1_1: Q1.1 R2.1 R3.2 U2.5 | length 11
  Top Layer w0.3: R2.1@148.3,125 149.875,125 ; Q1.1 149.875,121.39 149.875,124.9 149.925,124.95 ; U2.5 149.875,125 ; R3.2 151.8,125 149.875,125
NetQ1_3: Q1.3 R8.1 | length 3.9
  Top Layer w0.3: R8.1 147.828,119.147 148.145,118.83 Q1.3
NetQ2_1: Q2.1 R6.1 R7.2 U3.5 | length 11.4
  Top Layer w0.3: R7.2 138.887,125.025 ; Q2.1 138.887,122.884 138.887,125.025 ; U3.5@138.877,128.857 138.887,128.847 138.887,125.025 ; R6.1@140.51,125.002 140.487,125.025 138.887,125.025
NetR1_1: R1.1 U2.1 | length 23.2
  Top Layer w0.3: U2.1 157.03,136.47 158.025,135.475 158.025,123.7 160.022,121.702 R1.1
NetR5_1: R5.1 U3.1 | length 3.2
  Top Layer w0.3: U3.1@141.417,136.477 141.417,139.665 R5.1
NetU1_2: U1.2 U1.3
pads on no net: J3.1 J3.2 J3.4 J3.5 J3.6 J3.8 J3.9 J3.10 J4.1 J4.2 J4.5 J4.6 J4.7 J4.8 J6.1 J6.2 J6.3 J6.4 J6.5 J6.6 J9.1 J9.2 J9.3 J9.4 J9.7 J9.8 U1.5 U1.6 U1.8 U1.9 U1.10 U1.11 U1.12 U1.13 U2.3 U2.6 U3.3 U3.6

## Polygon pours and split planes (outlines as drawn)
no net on Top Layer "NONET_L01_P120" (solid, remove dead copper, pour order 120): 34.003,10.029
no net on Top Layer "NONET_L01_P130" (solid, remove dead copper, pour order 130): 33.603,41.529
no net on Top Layer "NONET_L01_P-001" (solid, remove dead copper, pour order 134): 64.503,8.429
no net on Top Layer "NONET_L01_P-001" (solid, remove dead copper, pour order 136): 64.503,8.429
no net on Top Layer "NONET_L01_P-001" (solid, remove dead copper, pour order 142): 70.158,3.699
no net on Top Layer "NONET_L01_P-001" (solid, remove dead copper, pour order 146): 72.707,3.699
no net on Top Layer "NONET_L01_P-001" (solid, remove dead copper, pour order 152): 95.403,43.929
no net on Top Layer "NONET_L01_P-001" (solid, remove dead copper, pour order 154): 74.803,40.629
no net on Top Layer "NONET_L01_P-001" (solid, remove dead copper, pour order 156): 33.403,13.529
no net on Top Layer "NONET_L01_P-001" (solid, remove dead copper, pour order 158): 33.603,13.629
no net on Bottom Layer "NONET_L02_P084" (solid, remove dead copper, pour order 84): 48.603,10.329
no net on Bottom Layer "NONET_L02_P086" (solid, remove dead copper, pour order 86): 33.303,8.329
no net on Bottom Layer "NONET_L02_P088" (solid, remove dead copper, pour order 88): 33.703,8.329
no net on Bottom Layer "NONET_L02_P090" (solid, remove dead copper, pour order 90): 101.303,55.429
no net on Bottom Layer "NONET_L02_P092" (solid, remove dead copper, pour order 92): 102.203,55.129
no net on Bottom Layer "NONET_L02_P094" (solid, remove dead copper, pour order 94): 33.503,52.929
no net on Bottom Layer "NONET_L02_P096" (solid, remove dead copper, pour order 96): 81.507,12.332
no net on Bottom Layer "NONET_L02_P098" (solid, remove dead copper, pour order 98): 79.303,12.629
no net on Bottom Layer "NONET_L02_P104" (solid, remove dead copper, pour order 104): 41.416,12.034

## Keep-outs
Keep-Out Layer:
  lines w0.2: 171.1,165.6 171.1,112.6 120.6,112.6 120.6,165.625 171.1,165.625

## Text inside footprints (layer, text, board x,y; h text height)
J1: Top Overlay "2" at 159.092,130.032 h1 r90; Top Overlay "1" at 159.092,125.111 h1 r90; Mechanical 14 "2" at 159.092,130.032 h1 r90; Mechanical 14 "1" at 159.092,125.111 h1 r90
J2: Top Overlay "2" at 128.807,141.872 h1 r270; Top Overlay "1" at 128.807,146.793 h1 r270; Mechanical 14 "2" at 128.807,141.872 h1 r270; Mechanical 14 "1" at 128.807,146.793 h1 r270
J5: Top Overlay "2" at 159.017,152.833 h1 r90; Top Overlay "1" at 159.017,147.912 h1 r90; Mechanical 14 "2" at 159.017,152.833 h1 r90; Mechanical 14 "1" at 159.017,147.912 h1 r90
J7: Top Overlay "2" at 128.883,153.227 h1 r270; Top Overlay "1" at 128.883,158.149 h1 r270; Mechanical 14 "2" at 128.883,153.227 h1 r270; Mechanical 14 "1" at 128.883,158.149 h1 r270
J8: Top Overlay "2" at 159.092,141.478 h1 r90; Top Overlay "1" at 159.092,136.557 h1 r90; Mechanical 14 "2" at 159.092,141.478 h1 r90; Mechanical 14 "1" at 159.092,136.557 h1 r90
U1: Top Overlay "*" at 145.782,157.91 h1.27; Mechanical 13 "*" at 145.782,157.91 h1.27
U2: Top Overlay "*" at 153.202,136.787 h1.27 r270; Mechanical 13 "*" at 151.78,135.924 h1.27 r270
U3: Top Overlay "*" at 142.205,136.745 h1.27 r270; Mechanical 13 "*" at 140.782,135.881 h1.27 r270